# Altium PCB Protoboard.PcbDoc
Units mm, origin at the board's own origin, x right, y up, seen from the top; angles counter-clockwise.
Board outline 50 x 50 mm, 2 copper layers (Top Layer, Bottom Layer); 2 components, 0 nets, 188 pads, 56 vias.
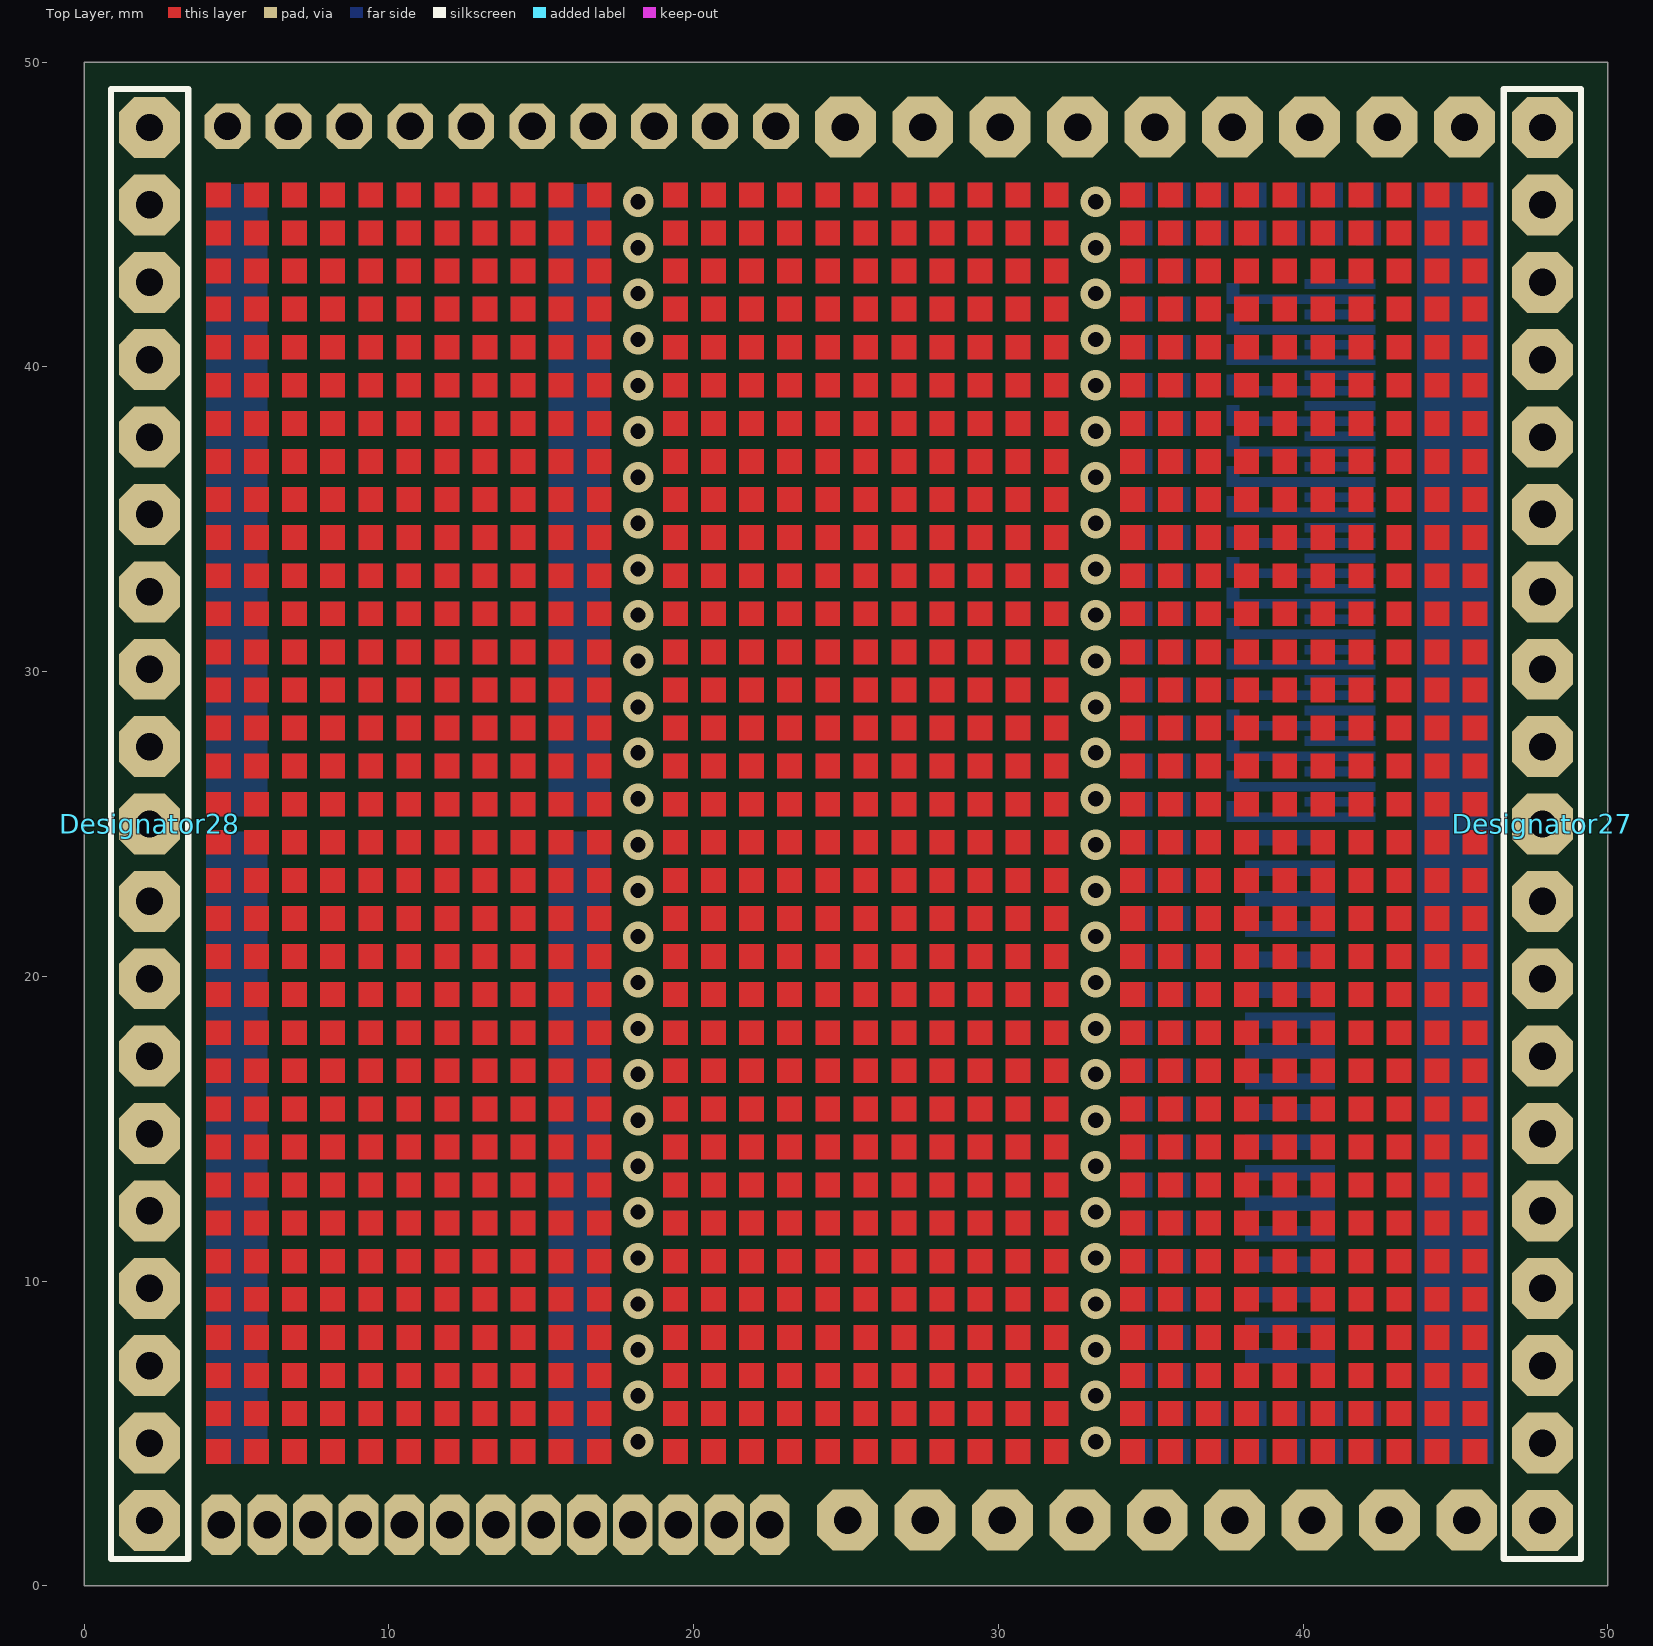
[diagram p0: Top Layer view]
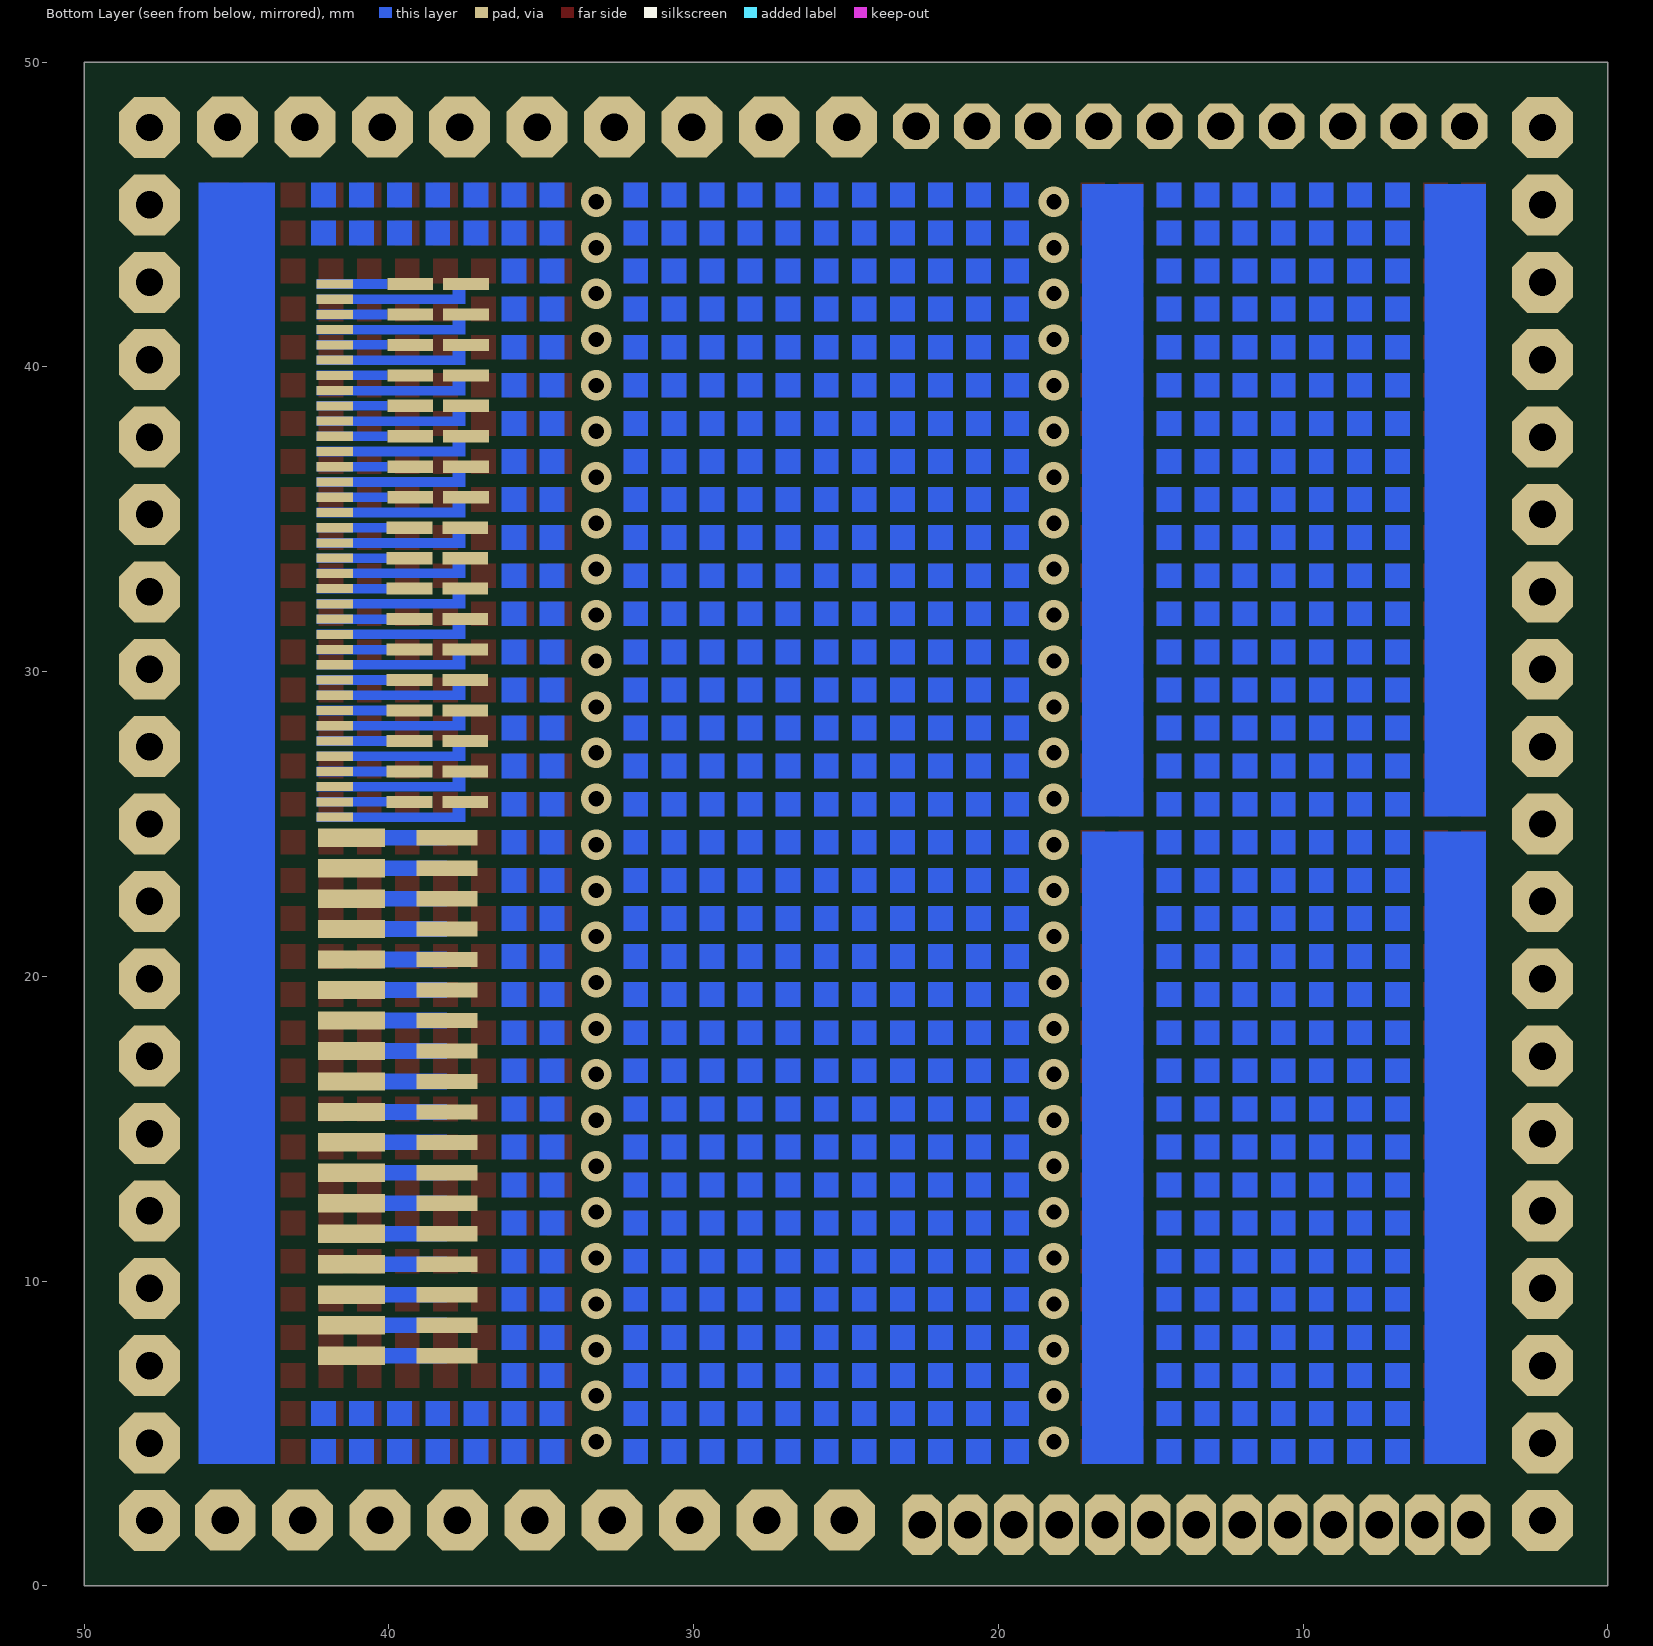
[diagram p1: Bottom Layer view, seen from below]

## Layer stack, top to bottom
Top Solder: solder mask 0.0102, Solder Resist, Dk 3.5
Top Layer: signal copper 0.0356
Dielectric 1: dielectric 0.32, FR-4, Dk 4.8
Bottom Layer: signal copper 0.0356
Bottom Solder: solder mask 0.0102, Solder Resist, Dk 3.5

## Board outline
0,0 0,50 50,50 50,0

## Design rules (kind name [scope] priority, off if disabled: settings)
Clearance [All] p1: gap=0.254 ignorepadtopadclearanceinfootprint=FALSE except(0: Arc-Hole Track-Hole SMDPad-Hole THPad-Hole Via-Hole Fill-Hole Poly-Hole Region-Hole Text-Hole)
PolygonConnect [All] p1: connectstyle=Relief reliefconductorwidth=0.254 reliefentries=4 polygonreliefangle="90 Angle" airgapwidth=0.254
RoutingVias [All] p1: holewidth=0.711 width=1.27 viastyle="Through Hole" minholewidth=0.711 minwidth=1.27 maxholewidth=0.711 maxwidth=1.27
SolderMaskExpansion [All] p1: expansion=0.102
Width [All] p1: maxlimit=0.254 minlimit=0.254 preferedwidth=0.254
30 further rules are at their usual default settings.

## Components (designator, comment, footprint, x,y, rotation, side; value= is the part's Value field where it differs from the comment)
Designator27 "Comment" HDR1X19 47.86,2.14 r90 top locked
Designator28 "Comment" HDR1X19 2.14,2.14 r90 top locked

## Footprints (in the part's own frame and the unit in brackets; to place one, negate y for a bottom-side part, rotate by r counter-clockwise, add the part's x,y. Pads: shape width x height; smd on the part's side, far side on the other; paste and mask are expansions set on the pad)
HDR1X19 [mm] "Connector; Header; 19 Position"
  oct 2x2 hole 0.9: 1(0,0) 2(2.54,0) 3(5.08,0) 4(7.62,0) 5(10.16,0) 6(12.7,0) 7(15.24,0) 8(17.78,0) 9(20.32,0) 10(22.86,0) 11(25.4,0) 12(27.94,0) 13(30.48,0) 14(33.02,0) 15(35.56,0) 16(38.1,0) 17(40.64,0) 18(43.18,0) 19(45.72,0)
  silkscreen extent -1.27,-1.27 46.99,1.27

## Free pads (board coordinates)
  oct 1.3x2 hole 0.9: 1(4.5,2) 1(6,2) 1(7.5,2) 1(9,2) 1(10.5,2) 1(12,2) 1(13.5,2) 1(15,2) 1(16.5,2) 1(18,2) 1(19.5,2) 1(21,2) 1(22.5,2)
  oct 2x2 hole 0.9: 1(24.98,47.875) 1(25.055,2.15) 1(27.52,47.875) 1(27.595,2.15) 1(30.06,47.875) 1(30.135,2.15) 1(32.6,47.875) 1(32.675,2.15) 1(35.14,47.875) 1(35.215,2.15) 1(37.68,47.875) 1(37.755,2.15) 1(40.22,47.875) 1(40.295,2.15) 1(42.76,47.875) 1(42.835,2.15) 1(45.3,47.875) 1(45.375,2.15)
  rect 1.5x0.4 smd far side: 1(39.3,35.725) 1(39.3,36.725) 1(39.3,37.725) 1(39.3,38.725) 1(39.3,39.725) 1(39.3,40.725) 1(39.3,41.725) 1(39.3,42.725) 1(39.325,25.725) 1(39.325,26.725) 1(39.325,27.725) 1(39.325,28.725) 1(39.325,29.725) 1(39.325,30.725) 1(39.325,31.725) 1(39.325,32.725) 1(39.325,33.725) 1(39.325,34.725) 2(37.475,35.725) 2(37.475,36.725) 2(37.475,37.725) 2(37.475,38.725) 2(37.475,39.725) 2(37.475,40.725) 2(37.475,41.725) 2(37.475,42.725) 2(37.5,25.725) 2(37.5,26.725) 2(37.5,27.725) 2(37.5,28.725) 2(37.5,29.725) 2(37.5,30.725) 2(37.5,31.725) 2(37.5,32.725) 2(37.5,33.725) 2(37.5,34.725)
  oct 1.5x1.5 hole 0.9: 2(4.7,47.9) 3(6.7,47.9) 4(8.7,47.9) 5(10.7,47.9) 6(12.7,47.9) 7(14.7,47.9) 8(16.7,47.9) 9(18.7,47.9) 10(20.7,47.9) 11(22.7,47.9)
  rect 1.2x0.3 smd far side: 12(41.775,25.225) 12(41.775,25.725) 12(41.775,26.225) 12(41.775,26.725) 12(41.775,27.225) 12(41.775,27.725) 12(41.775,28.225) 12(41.775,28.725) 12(41.775,29.225) 12(41.775,29.725) 12(41.775,30.225) 12(41.775,30.725) 12(41.775,31.225) 12(41.775,31.725) 12(41.775,32.225) 12(41.775,32.725) 12(41.775,33.225) 12(41.775,33.725) 12(41.775,34.225) 12(41.775,34.725) 12(41.775,35.225) 12(41.775,35.725) 12(41.775,36.225) 12(41.775,36.725) 12(41.775,37.225) 12(41.775,37.725) 12(41.775,38.225) 12(41.775,38.725) 12(41.775,39.225) 12(41.775,39.725) 12(41.775,40.225) 12(41.775,40.725) 12(41.775,41.225) 12(41.775,41.725) 12(41.775,42.225) 12(41.775,42.725)
  rect 2.2x0.6 smd far side: 13(41.225,7.55) 14(41.225,8.55) 15(41.225,9.55) 16(41.225,10.55) 17(41.225,11.55) 18(41.225,12.55) 19(41.225,13.55) 20(41.225,13.55) 21(41.225,14.55) 22(41.225,15.55) 23(41.225,16.55) 24(41.225,17.55) 25(41.225,18.55) 26(41.225,19.55) 27(41.225,20.55) 28(41.225,21.55) 29(41.225,22.55) 30(41.225,23.55) 31(41.225,24.55)
  rect 2x0.5 smd far side: 32(38.1,8.55) 32(38.1,10.55) 32(38.1,12.55) 32(38.1,14.55) 32(38.1,16.55) 32(38.1,18.55) 32(38.1,20.55) 32(38.1,22.55) 32(38.1,24.55) 33(38.1,7.55) 33(38.1,9.55) 33(38.1,11.55) 33(38.1,13.55) 33(38.1,15.55) 33(38.1,17.55) 33(38.1,19.55) 33(38.1,21.55) 33(38.1,23.55)

## Via types
v1: diameter 1, hole 0.5, Top Layer to Bottom Layer, 56 vias

## Nets (pads, with @x,y where several pads share a name; then routed paths per layer and width w, separated by ;. In a path a pad name is that pad's centre, name@x,y a point inside that pad or via, vN(x,y) a via of type N, cw(c..) or ccw(c..) an arc to the next point about the centre after c; other vN are vias at no path point)
pads on no net: Designator27.1 Designator27.2 Designator27.3 Designator27.4 Designator27.5 Designator27.6 Designator27.7 Designator27.8 Designator27.9 Designator27.10 Designator27.11 Designator27.12 Designator27.13 Designator27.14 Designator27.15 Designator27.16 Designator27.17 Designator27.18 Designator27.19 Designator28.1 Designator28.2 Designator28.3 Designator28.4 Designator28.5 Designator28.6 Designator28.7 Designator28.8 Designator28.9 Designator28.10 Designator28.11 Designator28.12 Designator28.13 Designator28.14 Designator28.15 Designator28.16 Designator28.17 Designator28.18 Designator28.19
copper on no net:
  other v1: 18.175,4.725 33.2,4.725 18.175,6.232 33.2,6.232 18.175,7.74 33.2,7.74 18.175,9.247 33.2,9.247 18.175,10.755 33.2,10.755 18.175,12.262 33.2,12.262 18.175,13.769 33.2,13.769 18.175,15.277 33.2,15.277 18.175,16.784 33.2,16.784 18.175,18.292 33.2,18.292 18.175,19.799 33.2,19.799 18.175,21.306 33.2,21.307 18.175,22.814 33.2,22.814 18.175,24.321 33.2,24.321 18.175,25.829 33.2,25.829 18.175,27.336 33.2,27.336 18.175,28.843 33.2,28.844 18.175,30.351 33.2,30.351 18.175,31.858 33.2,31.858 18.175,33.366 33.2,33.366 18.175,34.873 33.2,34.873 18.175,36.381 33.2,36.381 18.175,37.888 33.2,37.888 18.175,39.395 33.2,39.395 18.175,40.903 33.2,40.903 18.175,42.41 33.2,42.41 18.175,43.918 33.2,43.918 18.175,45.425 33.2,45.425

## Other copper
Top Layer:
  drawing of 1088 lines, arcs and shapes, not listed
Bottom Layer:
  drawing of 777 lines, arcs and shapes, not listed

## Silkscreen, mask and mechanical layers (free items; w line width, h text height)
Top Solder:
  drawing of 1088 lines, arcs and shapes, not listed
Bottom Solder:
  drawing of 706 lines, arcs and shapes, not listed
Mechanical 1:
  the board outline again, w1.2